# EAGLE board XBee FX I2C Interface v1.5 (EAGLE 6.4)
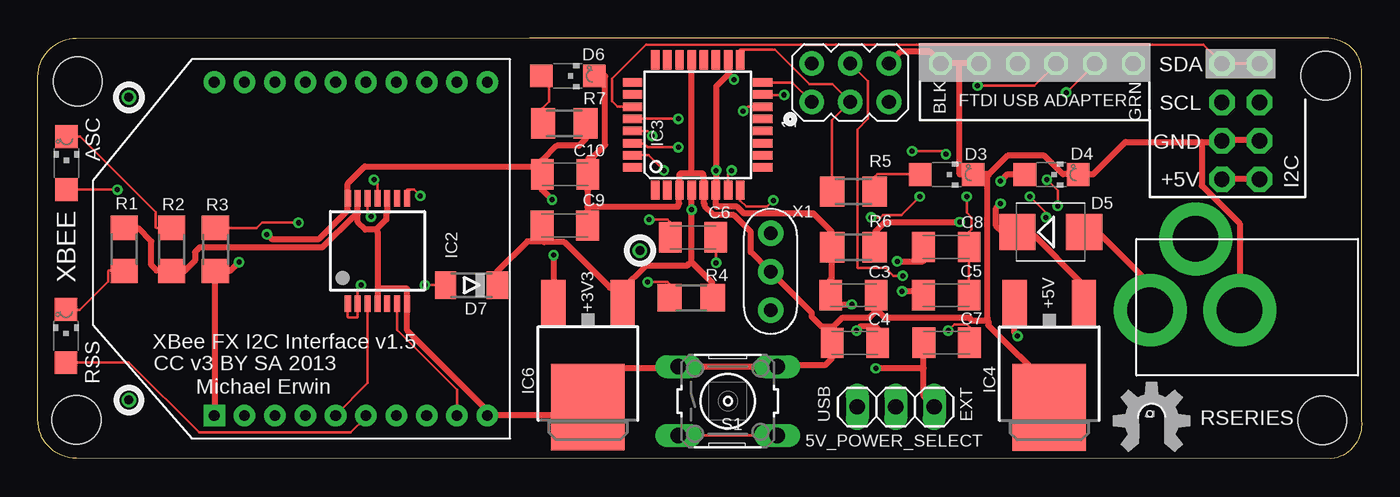
[diagram p0: board, top side]
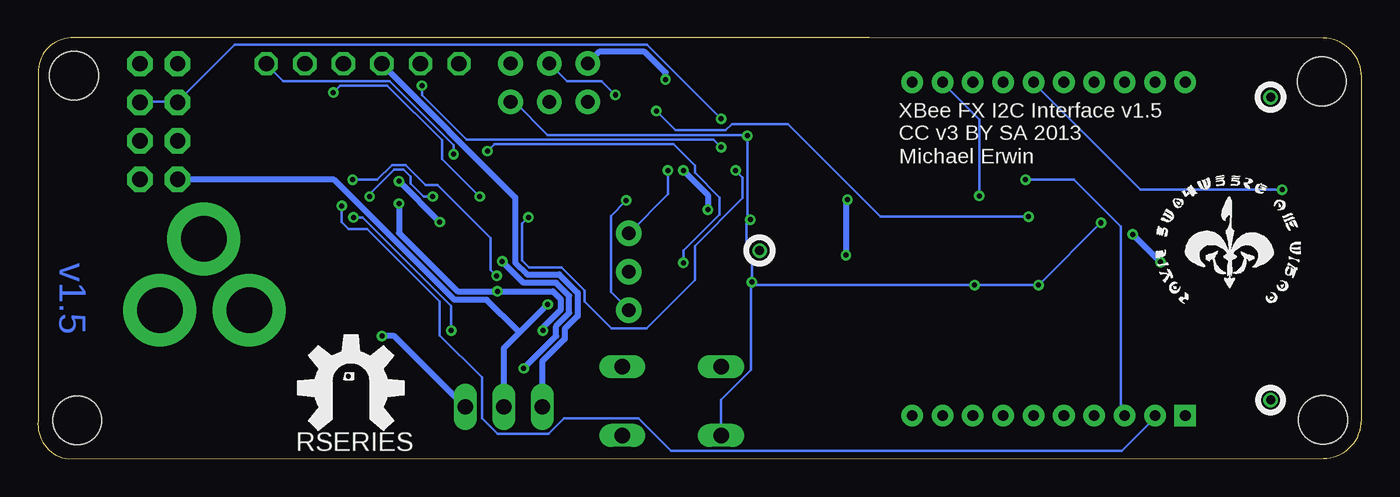
[diagram p1: board, bottom side, seen from below]

Size 87.24 x 27.76 mm. Coordinates in mm from the lower left corner, seen from the top.
Outline: 32.44,27.76 85.06,27.76 arc-90 87.22,25.45 87.22,2.51 arc-90 85.22,0 2.54,0.03 arc-90 0,2.57 0,25.2 arc-90 2.54,27.74 32.44,27.76
Copper layers (1*16): Top 0.0356mm / dielectric 1.5011mm / Bottom 0.0356mm
Design rules "LaenPCBOrder *": minimum track width 6mil, minimum drill 13mil, track to track 6mil, track to pad 6mil, pad to pad 6mil, via to via 12mil, smd to smd 6mil, copper to edge 15mil, drill to drill 6mil, minimum pad ring 7mil, minimum via ring 7mil, stop-mask expansion 4mil, vias tented up to drill 14mil, thermal gap 10mil
Net classes: 1 supply: width 0.381 mm, drill 0.152 mm, clearance 0.152 mm; 2 GND: width 0.381 mm, drill 0.305 mm, clearance 0.152 mm
Holes 3.2 mm at 2.54,2.57 2.62,24.89 84.86,25.27 84.66,2.54

## Footprints (pad centres in the part's own frame; a part is rotated, then mirrored left to right if it is on the bottom)
1X03 = drill 1.016 long: 1 -2.54,0; 2 0,0; 3 2.54,0
C1206K = smd 1.5 x 2: 1 -1.5,0; 2 1.5,0
CHIPLED_1206 = smd 1.5 x 1.5: A 0,-1.75; C 0,1.75
SMB = smd 2.4 x 2.4: A 2.2,0; C -2.2,0
MINIMELF = smd 1.4 x 1.8: A 1.7,0; C -1.7,0
1X04-CB = drill 1.016 pad 1.676 octagon: 1 -3.81,0; 2 -1.27,0; 3 1.27,0; 4 3.81,0
SSOP14 = smd 0.4 x 1.1: 1 -1.95,-3.475; 2 -1.3,-3.475; 3 -0.65,-3.475; 4 0,-3.475; 5 0.65,-3.475; 6 1.3,-3.475; 7 1.95,-3.475; 8 1.95,3.475; 9 1.3,3.475; 10 0.65,3.475; 11 0,3.475; 12 -0.65,3.475; 13 -1.3,3.475; 14 -1.95,3.475
TQFP32-08 = smd 1.27 x 0.559: 1 -4.293,2.8; 2 -4.293,2; 3 -4.293,1.2; 4 -4.293,0.4; 5 -4.293,-0.4; 6 -4.293,-1.2; 7 -4.293,-2; 8 -4.293,-2.8; 17 4.293,-2.8; 18 4.293,-2; 19 4.293,-1.2; 20 4.293,-0.4; 21 4.293,0.4; 22 4.293,1.2; 23 4.293,2; 24 4.293,2.8 | smd 0.559 x 1.27: 9 -2.8,-4.293; 10 -2,-4.293; 11 -1.2,-4.293; 12 -0.4,-4.293; 13 0.4,-4.293; 14 1.2,-4.293; 15 2,-4.293; 16 2.8,-4.293; 25 2.8,4.293; 26 2,4.293; 27 1.2,4.293; 28 0.4,4.293; 29 -0.4,4.293; 30 -1.2,4.293; 31 -2,4.293; 32 -2.8,4.293
DPAK = smd 1.6 x 3: 1 -2.28,-5.31; 3 2.28,-5.31 | smd 4.826 x 5.715: 4 0,1.588
AVRISP = drill 0.9 pad 1.626: 1 -1.27,2.54; 2 1.27,2.54; 3 -1.27,0; 4 1.27,0; 5 -1.27,-2.54; 6 1.27,-2.54
PJ-102A = drill 3 pad 4.8: RING 0.1,-3.39; RING_SW -4.6,-6.29; TIP 0.1,-9.29
1X06-CLEAN = drill 1.016 octagon: 1 -6.35,0; 2 -3.81,0; 3 -1.27,0; 4 1.27,0; 5 3.81,0; 6 6.35,0
R1206 = smd 1.6 x 1.803: 1 -1.422,0; 2 1.422,0
M1206 = smd 1.6 x 2: 1 -1.4,0; 2 1.4,0
B3F-10XX = drill 1.016 long: 1 -3.251,2.261; 2 3.251,2.261; 3 -3.251,-2.261; 4 3.251,-2.261
CERM_OSC = drill 0.9 pad 1.676: P$1 -2.54,0; P$2 0,0; P$3 2.54,0
XBEE = drill 0.7 pad 1.422 square: 1 -11,5.5 | drill 0.7 pad 1.422: 2 -11,3.5; 3 -11,1.5; 4 -11,-0.5; 5 -11,-2.5; 6 -11,-4.5; 7 -11,-6.5; 8 -11,-8.5; 9 -11,-10.5; 10 -11,-12.5; 11 11,-12.5; 12 11,-10.5; 13 11,-8.5; 14 11,-6.5; 15 11,-4.5; 16 11,-2.5; 17 11,-0.5; 18 11,1.5; 19 11,3.5; 20 11,5.5

## Placement (x,y rotation side)
5V_POWER_SELECT  [1X03]  56.54,3.43 180 top
C3  0.1uF  [C1206K]  53.75,10.79 0 top
C4  0.1uF  [C1206K]  53.85,7.65 180 top
C5  10uf 25V  [C1206K]  59.87,10.79 0 top
C6  0.1uF  [C1206K]  43.18,14.6 180 top
C7  10uf 25V  [C1206K]  59.89,7.67 0 top
C8  0.1uF  [C1206K]  59.87,13.97 0 top
C9  10uf 25V  [C1206K]  34.72,15.39 0 top
C10  0.1uF  [C1206K]  34.75,18.77 0 top
D1  [CHIPLED_1206]  1.85,8.1 0 top
D2  [CHIPLED_1206]  1.88,19.51 0 top
D3  RED  [CHIPLED_1206]  59.89,18.75 270 top
D4  [CHIPLED_1206]  66.8,18.75 270 top
D5  [SMB]  66.75,14.96 0 top
D6  [CHIPLED_1206]  34.92,25.25 270 top
D7  CD1206-S01575  [MINIMELF]  28.57,11.46 180 top
I2C  [1X04-CB]  78.03,22.25 270 top
I2C1  [1X04-CB]  80.52,22.25 270 top
IC2  74ABT125DB  [SSOP14]  22.38,13.72 0 top
IC3  MEGA48/88/168-AU  [TQFP32-08]  43.48,22.02 90 top
IC4  LM2931_FIXED  [DPAK]  66.65,4.98 180 top
IC6  LM2931_FIXED  [DPAK]  36.25,5 180 top
ICSP  AVRISP-6  [AVRISP]  53.54,24.82 90 top
J2  2.1MMJACK  [PJ-102A]  82.6,9.91 270 top
JP7  [1X06-CLEAN]  65.84,26.06 0 top
R1  1K  [R1206]  5.69,13.82 270 top
R2  1K  [R1206]  8.81,13.82 90 top
R3  10K  [R1206]  11.71,13.82 90 top
R4  10K  [R1206]  43.05,10.62 180 top
R5  1.0 K  [M1206]  53.75,17.63 0 top
R6  1.0 K  [M1206]  53.75,13.94 0 top
R7  1.0 K  [M1206]  34.7,22.12 180 top
S1  RESET  [B3F-10XX]  45.47,3.81 0 top
U$2  [RSERIES-OSHW-LOGO-LARGE]  66.6,4.67 0 bottom
U$5  [ROYAL-ENGINEERS-OF-NABOO-SMALL]  13.64,9.93 0 bottom
U$6  RSERIES-OSHW-LOGOMEDIUM  [RSERIES-OSHW-LOGO-MEDIUM]  73.3,2.57 0 top
X1  16.00MHz  [CERM_OSC]  48.29,12.34 270 top
XBEE  XBEE  [XBEE]  17.12,13.84 90 top

## Library data of the parts
5V_POWER_SELECT = pinhead
C3 C4 C6 C8 C10 D1-D4 D6 J2 R5-R7 = minimidi
C5 C7 C9 = rcl
D5 D7 = diode
I2C I2C1 JP7 = carduino
IC2 = 74xx-us
IC3 = avr-7
IC4 IC6 = SparkFun-PowerIC
ICSP = adafruit
R1-R4 = rcl-ez
S1 = switch-omron
U$2 U$5 U$6 = rseries
X1 = digg
XBEE = ulink

## Nets
+3V3 [supply]: C10.1 IC2.14 IC6.3 R3.1 R7.1 XBEE.1
+5V [supply]: 5V_POWER_SELECT.2 C3.1 C9.1 D7.C I2C1.4 I2C.4 IC3.4 IC3.6 IC3.18 IC6.1 ICSP.2 R4.1 R6.1
+9V [supply]: C4.1 C5.1 D5.C IC4.1
ANALOG0: IC3.23
ANALOG1: IC3.24
ANALOG2: IC3.25
ANALOG3: IC3.26
ANALOG4: I2C1.1 I2C.1 IC3.27
ANALOG5: I2C1.2 I2C.2 IC3.28
AREF: IC3.20
DIGITAL2: IC3.32
DIGITAL3: IC3.1
DIGITAL4: IC3.2
DIGITAL5: IC3.9
DIGITAL6: IC3.10
DIGITAL7: IC3.11
DIGITAL8: IC3.12
DIGITAL9: IC3.13
DIGITAL10: IC2.12 IC3.14
GND [GND]: C3.2 C4.2 C9.2 C10.2 D3.C D4.C D6.C I2C1.3 I2C.3 IC2.4 IC2.7 IC2.10 IC2.13 IC3.3 IC3.5 IC3.21 IC4.4 IC6.4 ICSP.6 J2.RING JP7.1 JP7.2 R1.1 R2.1 S1.1 S1.2 X1.P$2 XBEE.10
MISO: IC3.16 ICSP.1
MOSI: IC3.15 ICSP.4 XBEE.2
N$2: IC2.11 XBEE.3
N$3: IC2.5
N$5: D2.C R2.2
N$6: D6.A R7.2
N$7: D1.A XBEE.6
N$8: D1.C R1.2
N$10: IC2.6 XBEE.9
N$13: IC2.3 XBEE.5
N$21: IC2.9
N$22: IC2.8 XBEE.12
N$23: D2.A XBEE.15
N$25: IC3.7 X1.P$1
N$26: IC3.8 X1.P$3
N$27: D3.A R5.2
N$28 [supply]: D4.A R6.2
N$29 [supply]: D5.A J2.TIP
N$30: C5.2 C7.2 C8.2
N$31 [supply]: 5V_POWER_SELECT.1 C7.1 C8.1 IC4.3
RST: C6.2 D7.A IC2.1 IC2.2 IC3.29 ICSP.5 R3.2 R4.2 S1.3 S1.4
RTS: XBEE.16
RTS#: C6.1 JP7.6
RXD: IC3.30 JP7.4
SCK: IC3.17 ICSP.3 R5.1
TXD: IC3.31 JP7.5
USB_5V [supply]: 5V_POWER_SELECT.3 JP7.3

## Tracks (layer width: path | path; a pad name or v marks a point on that pad's centre or on a via)
+3V3  (via drill 0.33)
  Top 0.381: C10.1 33.22,18.77 33.22,19.69 34.19,20.65 35.66,20.65 36.12,21.11 36.12,22.12 R7.1 | v33.98,13.44 33.98,10.34 IC6.3 | v33.88,17.09 33.22,17.75 33.22,18.62 C10.1 | XBEE.1 11.63,2.87 11.63,12.42 11.68,12.42 R3.1 11.89,12.42 12.7,12.42 v13.26,12.98 | v15.09,14.81 15.39,14.5 18.54,14.5 20.42,16.38 20.42,17.15 IC2.14 20.42,17.35 20.42,18.16 21.54,19.28 33.07,19.28 C10.1
  Bottom 0.381: v33.98,13.44 33.98,16.99 v33.88,17.09 | v13.26,12.98 v15.09,14.81
+5V  (via drill 0.33)
  Top 0.381: 33.22,14.4 33.17,14.35 32.26,14.35 30.28,12.37 D7.C | 33.22,14.4 33.22,15.37 C9.1 | 43.08,12.98 v43.08,16.43 43.08,17.7 IC3.4 | 43.08,12.98 44.45,11.61 44.45,10.64 R4.1 | 43.08,12.98 42.93,12.88 42.77,12.73 40.03,12.73 38.51,11.2 38.51,10.34 IC6.1 38.35,11.3 37.69,11.3 34.7,14.3 33.38,14.3 33.22,14.4 | 45.47,25.32 44.7,24.56 v44.7,19.02 44.7,17.75 IC3.6 44.7,17.55 44.7,16.69 44.76,16.64 46.08,16.64 46.53,16.18 51.1,16.18 52.32,14.96 52.32,14.1 R6.1 52.32,13.94 52.32,11.91 52.22,11.81 52.22,10.95 C3.1 52.22,10.8 52.22,10.19 v53.65,10.19 | 45.47,25.32 45.47,26.29 IC3.18 | v45.87,25.02 45.62,25.27 45.47,25.32 | I2C.4 78.03,18.47 80.52,18.47 I2C1.4
  Bottom 0.381: ICSP.2 50.24,26.85 47.24,26.85 45.87,25.48 v45.87,25.02 | 5V_POWER_SELECT.2 56.54,7.29 55.5,8.33 | v53.65,10.19 55.5,8.33 | I2C.4 78.03,18.42 67.72,18.42 59.79,10.49 57.66,10.49 55.63,8.46 55.5,8.33 | v43.08,16.43 43.08,17.4 v44.7,19.02
+9V  (via drill 0.33)
  Top 0.381: v53.95,8.46 54.25,8.76 55.17,8.76 55.37,8.56 55.37,7.65 C4.1 | v56.95,11.05 58.37,11.05 C5.1 | IC4.1 68.94,10.34 68.94,11.3 68.89,11.35 68.89,11.51 65.43,14.96 64.57,14.96 D5.C 64.36,14.96 63.55,14.96 63.14,15.37 63.14,16.54 v63.45,16.84
  Bottom 0.381: v53.95,8.46 53.95,8.66 52.78,9.83 52.78,10.54 53.29,11.05 v56.95,11.05 57.1,11.05 59.59,11.05 63.45,14.91 v63.45,16.84
ANALOG4
  Top 0.152: IC3.27 39.17,23.24 38.2,23.24 37.85,23.6 37.85,25.07 40.08,27.31 76.81,27.31 78.03,26.09 I2C.1 78.08,26.09 80.52,26.09 I2C1.1
ANALOG5  (via drill 0.33)
  Top 0.152: v42.22,22.43 39.22,22.43 IC3.28
  Bottom 0.152: v42.22,22.43 47.09,27.31 74.27,27.31 78.03,23.55 I2C.2 78.08,23.55 80.52,23.55 I2C1.2
DIGITAL10  (via drill 0.33)
  Top 0.152: v21.95,15.98 21.74,16.18 21.74,17.15 IC2.12 | v46.48,22.94 46.79,23.24 47.75,23.24 IC3.14
  Bottom 0.152: v21.95,15.98 31.7,15.98 37.8,22.07 41.5,22.07 41.91,21.67 45.21,21.67 v46.48,22.94
GND
  Top 0.381: I2C1.3 80.52,21.01 78.03,21.01 I2C.3 77.88,20.9 76.71,20.9 | 62.59,18.77 62.69,18.77 63.91,19.99 66.34,19.99 67.56,18.77 68.53,18.77 D4.C 68.73,18.77 69.55,18.77 71.68,20.9 76.71,20.9 | 62.59,18.77 61.67,18.77 D3.C 61.47,18.77 60.76,18.77 60.71,18.82 60.71,25.93 60.71,26.09 | 60.71,26.09 62.03,26.09 JP7.2 | 60.71,26.09 59.49,26.09 JP7.1 59.38,26.24 58.78,26.85 56.84,26.85 ICSP.6 | J2.RING 79.2,9.83 79.2,15.52 76.71,18.01 76.71,20.75 76.71,20.9 | R1.1 5.69,15.21 6.6,15.21 7.47,14.35 7.47,12.78 7.82,12.42 8.79,12.42 R2.1 8.99,12.42 9.7,12.42 10.36,13.08 10.36,13.64 10.67,13.94 18.75,13.94 20.93,16.13 21.08,16.13 | 22.45,11.25 22.4,11.2 22.4,10.29 IC2.4 | 22.45,11.25 24.28,11.25 24.33,11.2 24.33,10.29 IC2.7 24.33,10.08 24.33,8.46 29.57,3.23 29.57,3.02 XBEE.10 29.67,2.87 36.27,2.87 36.27,3.38 IC6.4 36.27,3.58 36.27,4.29 37.95,5.97 42.06,5.97 S1.1 S1.2 48.87,6.17 51.87,6.17 52.32,6.63 52.32,7.49 C4.2 52.32,7.65 52.32,8.66 | 21.08,16.13 21.08,15.62 21.59,15.11 22.3,15.11 | 21.08,16.13 21.08,17.15 IC2.13 | 22.3,15.11 22.96,15.77 22.96,16.13 23.01,16.18 23.01,17.15 IC2.10 | 22.45,11.25 22.4,11.4 22.4,14.96 22.3,15.11 | IC3.3 42.27,17.75 IC3.3 | 43.08,18.82 43.79,18.82 43.84,18.77 43.84,18.67 43.89,18.62 43.89,17.75 | 43.08,18.82 42.37,18.82 42.27,18.72 42.27,17.91 IC3.3 | 43.89,17.75 IC3.5 | 43.89,17.75 IC3.5 | 43.89,17.75 IC3.5 | IC3.21 43.08,26.29 43.08,18.97 43.08,18.82 | D6.C 36.68,25.27 37.34,25.27 37.39,25.22 37.39,20.7 36.52,19.84 36.32,19.84 36.27,19.79 36.27,18.77 C10.2 36.27,18.62 36.27,17.75 36.22,17.7 36.22,16.64 | 36.22,16.64 36.22,15.42 C9.2
  Top 0.381: IC3.3 42.27,17.55 42.27,16.84 42.22,16.79 42.22,16.69 42.16,16.64 36.37,16.64 36.22,16.64 | 52.32,8.66 52.27,8.71 51.66,8.71 51,9.37 51,9.63 48.31,12.32 X1.P$2 48.16,12.47 46.99,13.64 46.99,14.96 45.87,16.08 44.55,16.08 43.94,16.69 43.94,16.79 43.89,16.84 43.89,17.55 IC3.5 | 55.27,9.78 55.27,10.8 C3.2 | 55.27,9.78 54.81,9.32 53.03,9.32 52.48,8.76 52.32,8.66 | 62.59,9.12 62.64,9.07 62.64,8.81 66.65,4.8 66.65,3.43 IC4.4 | 62.59,9.12 61.57,9.12 61.37,9.32 55.78,9.32 55.42,9.68 55.27,9.78 | 62.59,18.77 62.59,18.62 62.59,9.27 62.59,9.12
MISO
  Top 0.152: ICSP.1 49.73,24.82 47.8,24.82 IC3.16
MOSI  (via drill 0.33)
  Top 0.152: v49.17,24 47.8,24 IC3.15 | v67.21,16.69 67.21,17.7 v66.5,18.42 | v57,12.07 56.39,12.07 55.88,12.57 54.05,12.57 54,12.62 54,21.72 54.71,22.43 54.71,24.92 ICSP.4
  Bottom 0.152: v49.17,24 50.09,24.92 52.38,24.92 ICSP.4 | v67.21,16.69 67.21,15.62 66.75,15.16 65.53,15.16 60.76,10.39 60.76,8.15 57.96,5.36 57.96,2.67 56.95,1.65 53.59,1.65 52.58,2.67 47.65,2.67 45.52,0.53 15.8,0.53 13.66,2.67 13.66,2.82 XBEE.2 | v66.5,18.42 64.87,18.42 63.91,19.38 62.99,19.38 61.67,18.06 60.91,18.06 57.4,14.55 57.4,12.47 v57,12.07
N$1  (via drill 0.6)
  other vias: 5.99,23.85
N$2  (via drill 0.33)
  Top 0.152: v22.15,18.42 22.4,18.16 22.4,17.2 IC2.11
  Bottom 0.152: v22.15,18.42 18.95,18.42 15.85,15.32 15.85,3.07 15.65,2.87 XBEE.3
N$4  (via drill 0.6)
  other vias: 5.99,3.89
N$5
  Top 0.152: D2.C 2.79,21.26 7.77,16.28 7.77,15.27 7.82,15.21 8.79,15.21 R2.2
N$6
  Top 0.152: D6.A 33.22,25.27 33.68,25.27 33.68,23.55 33.27,23.14 33.27,22.12 R7.2
N$7
  Top 0.152: D1.A 1.88,6.38 5.99,6.38 10.62,1.75 20.62,1.75 21.59,2.72 21.59,2.82 XBEE.6
N$8
  Top 0.152: D1.C 1.88,9.83 2.74,9.83 4.62,11.71 4.62,12.37 4.67,12.42 5.69,12.42 R1.2
N$9  (via drill 0.6)
  other vias: 39.67,13.74
N$10
  Top 0.152: IC2.6 23.67,8.51 27.64,4.55 27.64,2.87 XBEE.9
N$13
  Top 0.152: IC2.3 21.74,10.24 21.74,5 19.61,2.87 XBEE.5
N$22  (via drill 0.33)
  Top 0.152: v25.2,17.35 24.79,17.75 24.33,17.75 IC2.8
  Bottom 0.152: v25.2,17.35 25.2,22.38 27.64,24.82 XBEE.12
N$23  (via drill 0.33)
  Top 0.152: v5.23,17.75 D2.A
  Bottom 0.152: v5.23,17.75 14.58,17.75 21.64,24.82 XBEE.15
N$25  (via drill 0.33)
  Top 0.152: v45.72,19.02 45.47,18.77 45.47,17.75 IC3.7
  Bottom 0.152: v45.72,19.02 45.72,17.45 48.26,14.91 X1.P$1
N$26  (via drill 0.33)
  Top 0.152: v48.46,17.04 48.06,16.64 46.69,16.64 46.28,17.04 46.28,17.7 IC3.8
  Bottom 0.152: v48.46,17.04 49.48,16.03 49.48,11 48.31,9.83 X1.P$3
N$27
  Top 0.152: D3.A 58.12,18.77 55.32,18.77 55.17,18.62 55.17,17.65 R5.2
N$28  (via drill 0.33)
  Top 0.381: v63.45,18.31 63.91,18.77 65.02,18.77 D4.A | v60.76,15.62 55.83,15.62 55.17,14.96 55.17,13.94 R6.2
  Bottom 0.381: v60.76,15.62 v63.45,18.31
N$29
  Top 0.381: D5.A 68.99,14.96 69.85,14.96 73.3,11.51 73.3,9.83 J2.TIP
N$30  (via drill 0.33)
  Top 0.152: v59.99,8.46 60.4,8.86 61.21,8.86 61.42,8.66 61.42,7.7 C7.2 | v66.45,15.93 66.45,16.23 v65.38,17.3 | v61.21,17.3 61.21,16.23 61.52,15.93 61.52,15.11 61.37,14.96 61.37,14 C8.2 61.37,13.89 C5.2
  Bottom 0.152: v59.99,8.46 59.99,10.08 65.84,15.93 v66.45,15.93 | v65.38,17.3 65.38,17.45 63.75,19.08 63.14,19.08 62.69,18.62 62.69,18.16 61.82,17.3 v61.21,17.3
N$31  (via drill 0.33)
  Top 0.381: 58.37,5.97 58.37,4.14 5V_POWER_SELECT.1 | 58.37,5.97 58.37,7.65 C7.1 | v56.64,13.03 58.32,13.03 58.37,13.08 58.37,13.94 C8.1 | v55.22,5.97 58.22,5.97 58.37,5.97 | v64.57,8.1 64.36,8.31 IC4.3
  Bottom 0.381: v56.64,13.03 55.22,11.61 53.09,11.61 52.22,10.74 52.22,9.63 53.09,8.76 53.09,8.1 v55.22,5.97 | v64.57,8.1 63.75,8.1 5V_POWER_SELECT.1
RST  (via drill 0.33)
  Top 0.152: IC2.1 20.42,9.37 20.47,9.32 21.03,9.32 21.08,9.37 IC2.2 21.08,10.29 21.08,11.25 v21.29,11.46 | v25.5,11.46 26.82,11.46 26.87,11.51 26.92,11.46 D7.A | v17.17,15.57 14.78,15.57 14.43,15.21 11.73,15.21 R3.2 | S1.4 S1.3 | v40.49,21.31 40.18,21.62 39.22,21.62 IC3.29 | v40.28,15.77 41.5,15.77 41.66,15.62 41.66,14.61 C6.2 | v40.18,11.66 41.5,11.66 41.66,11.51 41.66,10.64 R4.2
  Bottom 0.152: v17.17,15.57 21.23,11.51 v21.29,11.46 v25.5,11.46 25.55,11.46 40.18,11.46 v40.18,11.66 | v40.18,11.66 40.18,13.03 40.54,13.39 40.54,15.52 40.34,15.72 v40.28,15.77 40.49,15.98 v40.49,21.31 40.54,21.36 53.65,21.36 55.83,23.55 ICSP.5 | S1.3 42.22,3.89 40.23,5.87 40.23,11.61 v40.18,11.66
RTS#  (via drill 0.33)
  Top 0.152: v44.7,12.93 44.7,14.61 C6.1 | v57.61,20.29 59.64,20.29 v59.84,20.09
  Bottom 0.152: v44.7,12.93 44.7,13.74 42.32,16.13 42.32,17.25 43.94,18.87 43.94,19.33 45.36,20.75 57.15,20.75 v57.61,20.29 | v59.84,20.09 59.84,20.7 64.06,24.92 71.07,24.92 72.19,26.04 JP7.6
RXD  (via drill 0.33)
  Top 0.152: v42.22,20.55 40.18,20.55 39.93,20.8 39.22,20.8 IC3.30 | v61.92,24.61 65.68,24.61 67.11,26.04 JP7.4
  Bottom 0.152: v42.22,20.55 42.72,21.06 58.98,21.06 61.92,24 v61.92,24.61
SCK
  Top 0.152: IC3.17 46.28,26.34 46.28,27 48.56,27 50.85,24.71 52.38,24.71 ICSP.3 53.49,23.5 52.32,22.33 52.32,17.65 R5.1
TXD  (via drill 0.33)
  Top 0.152: v41.25,19.02 40.23,20.04 39.22,20.04 IC3.31 | v54.91,15.93 55.52,15.93 55.68,16.08 56.9,16.08 v58.12,17.3 | v67.77,24.16 69.65,26.04 JP7.5
  Bottom 0.152: v41.25,19.02 40.79,18.57 40.79,17.2 43.94,14.05 43.94,11.81 47.14,8.61 49.43,8.61 51.21,10.39 51.21,11.1 52.73,12.62 54.86,12.62 55.32,13.08 55.32,15.52 v54.91,15.93 | v58.12,17.3 60.6,19.79 60.6,21.01 64.21,24.61 67.31,24.61 v67.77,24.16
USB_5V
  Bottom 0.381: 5V_POWER_SELECT.3 54,6.43 52.53,7.9 52.53,8.56 51.66,9.42 51.66,10.95 52.88,12.17 55.02,12.17 55.78,12.93 55.78,17.25 64.57,26.04 JP7.3

## Text on the board
Bottom: v1.5
tPlace: SDA | BLK | GRN | FTDI USB ADAPTER | SCL | GND | +5V | I2C | +5V | +3V3 | XBee FX I2C Interface v1.5 | CC v3 BY SA 2013 / Michael Erwin | RSERIES
tNames: ASC | RSS
bNames: XBee FX I2C Interface v1.5 | CC v3 BY SA 2013 / Michael Erwin | RSERIES
_tsilk: USB | EXT